# Altium PCB BB Power Supply.PcbDoc
Units mil, origin at the board's own origin, x right, y up, seen from the top; angles counter-clockwise.
Board outline 2150 x 1400 mil, 2 copper layers (Top Layer, Bottom Layer); 20 components, 12 nets, 57 pads, 0 vias.
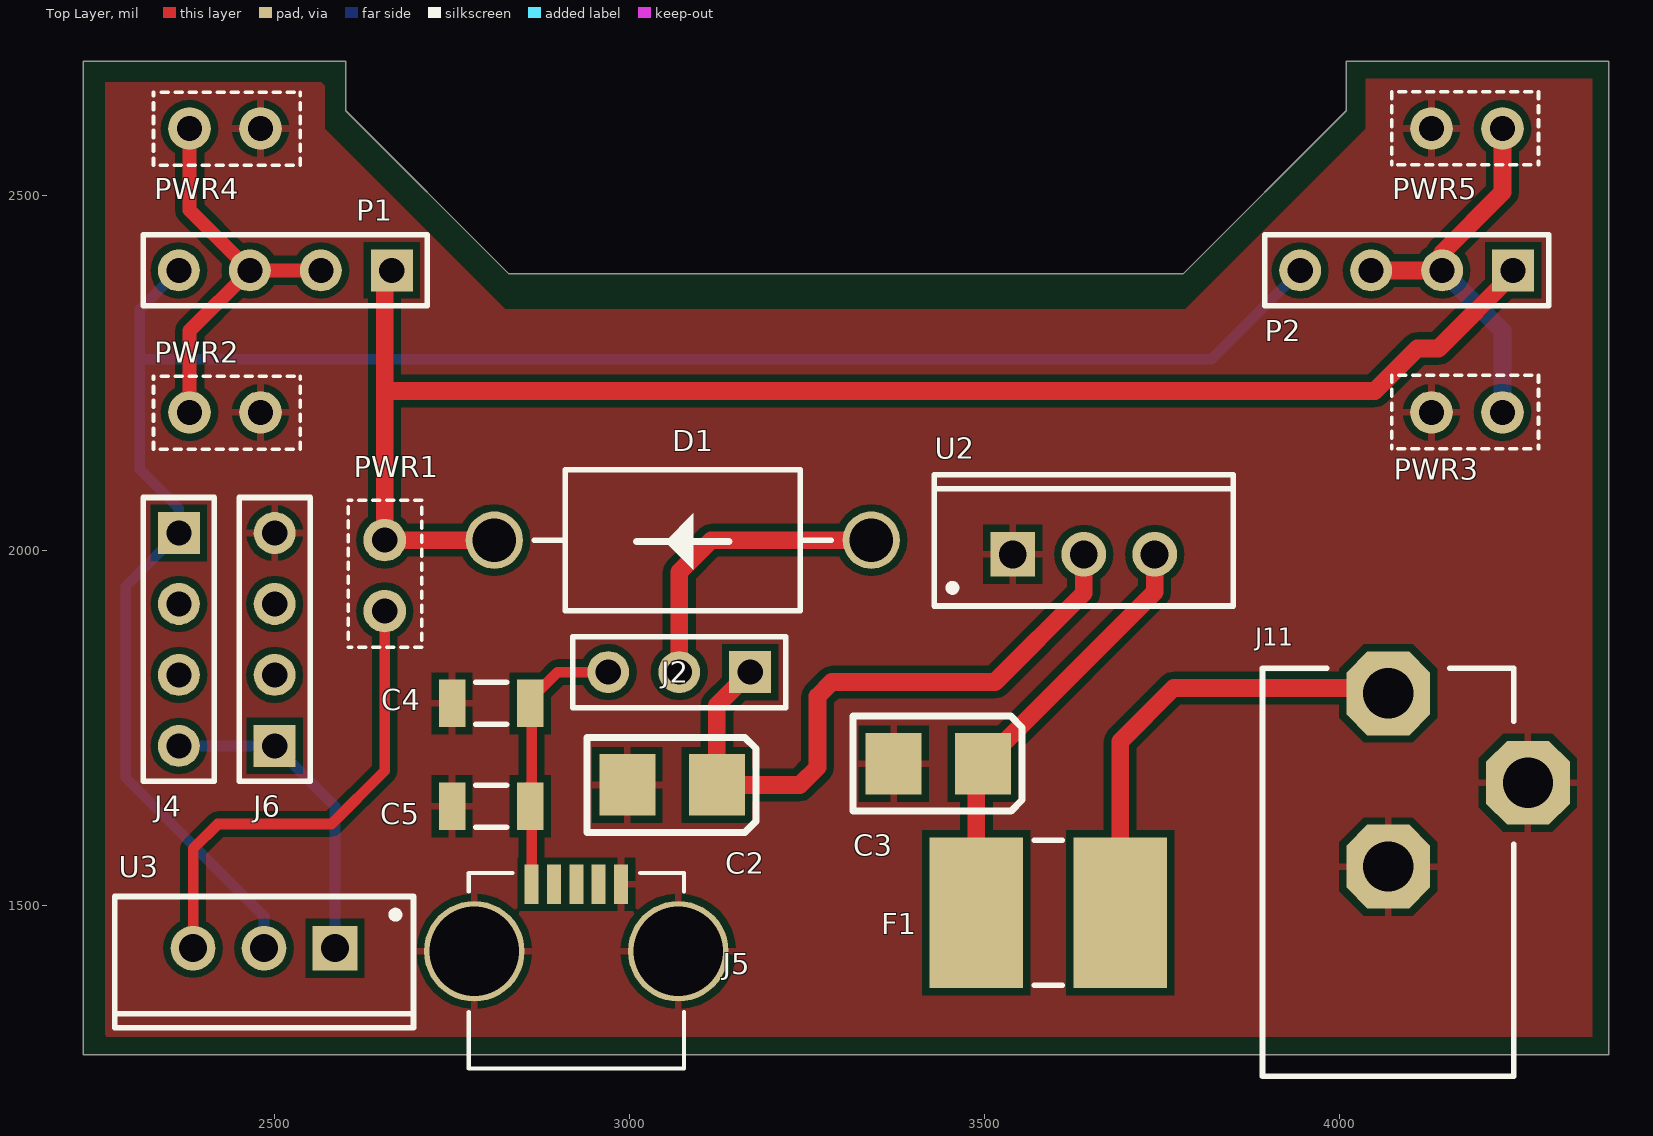
[diagram p0: Top Layer view]
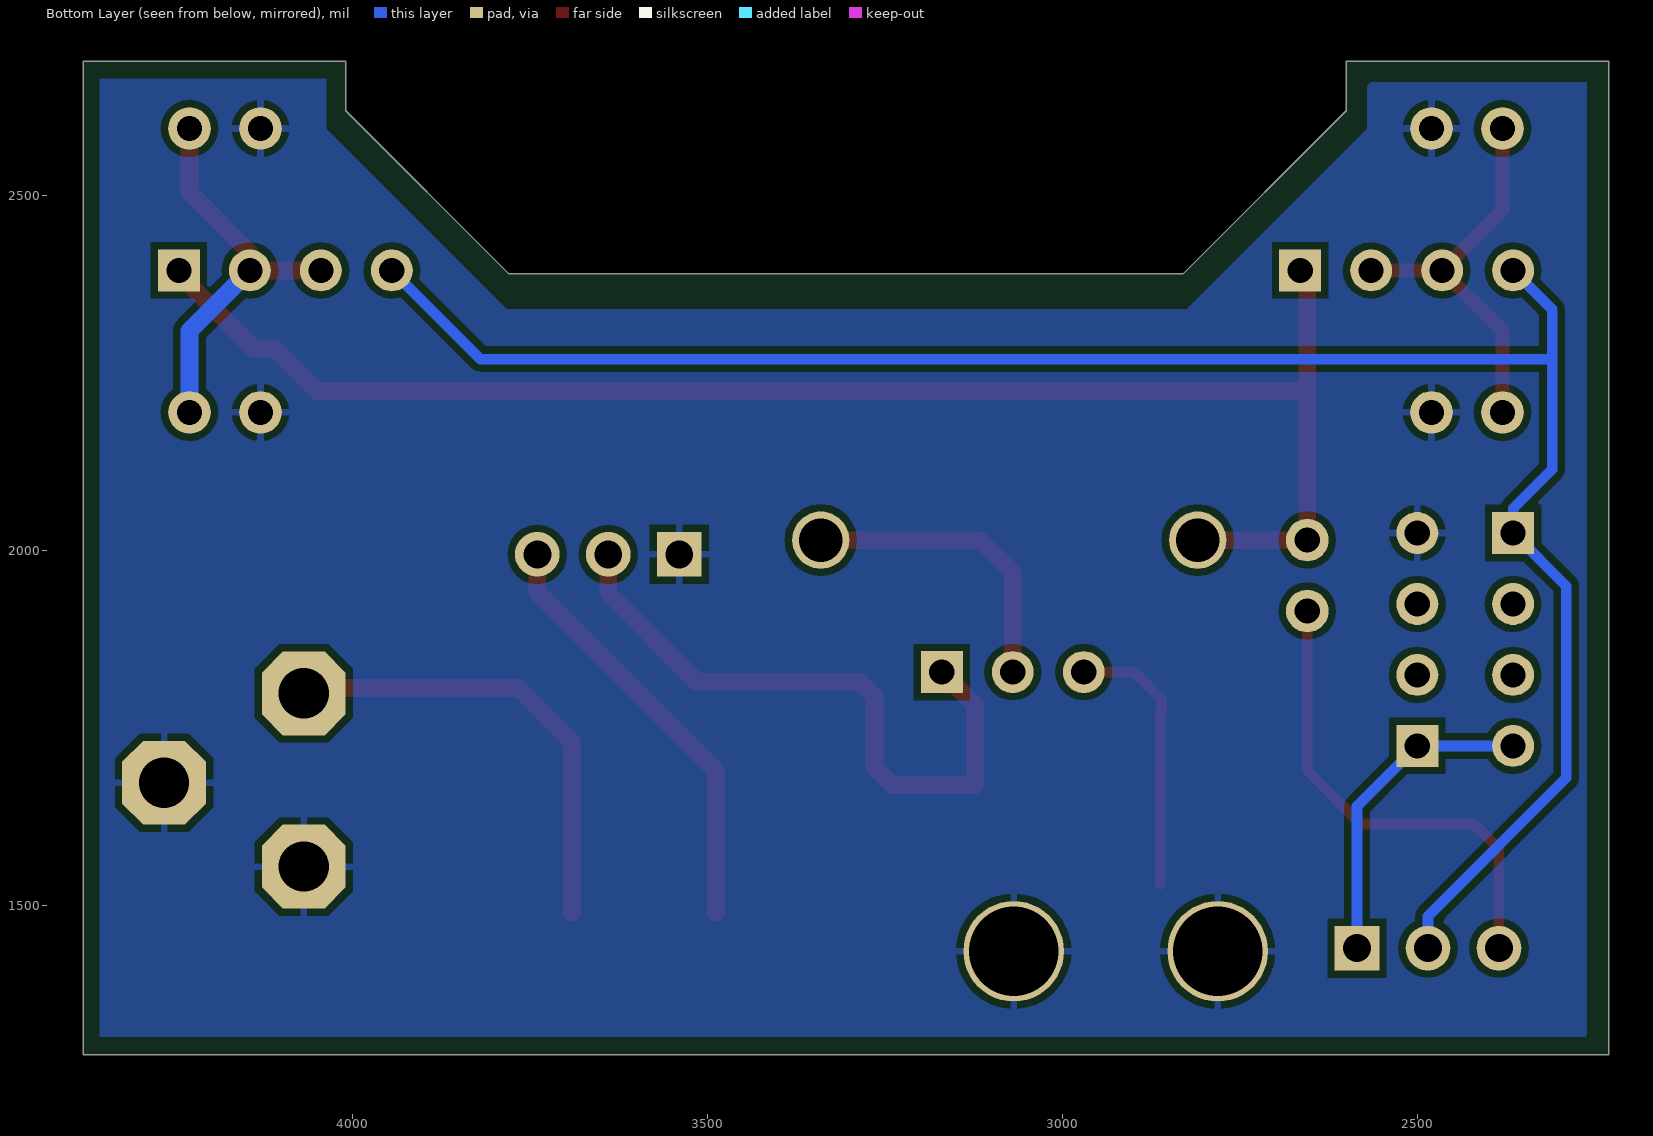
[diagram p1: Bottom Layer view, seen from below]

## Layer stack, top to bottom
Top Layer: signal copper 1.4
Dielectric: dielectric 12.6, FR-4, Dk 4.8
Bottom Layer: signal copper 1.4

## Board outline
2230,1290 2230,2690 2600,2690 2600,2620 2830,2390 3780,2390 4010,2620 4010,2690 4380,2690 4380,1290

## Design rules (kind name [scope] priority, off if disabled: settings)
Clearance [All] p1: gap=10
PolygonConnect [All] p1: connectstyle=Relief reliefconductorwidth=10 reliefentries=4 polygonreliefangle="90 Angle" airgapwidth=10
RoutingVias [All] p1: holewidth=28 width=50 viastyle="Through Hole" minholewidth=28 minwidth=50 maxholewidth=28 maxwidth=50
SolderMaskExpansion [All] p1: expansion=4
Width [All] p1: maxlimit=25 minlimit=7 preferedwidth=10
28 further rules are at their usual default settings.

## Components (designator, comment, footprint, x,y, rotation, side; value= is the part's Value field where it differs from the comment)
C2 "TAJB106K020R" AVX-CAPC3528_V 3060,1670 r180 top
C3 "TAJB106K020R" AVX-CAPC3528_V 3435,1700 r180 top
C4 "AP 4.7uF 6.3V 1206(3216)" CAPC1206(3216)190_L 2805,1785 r180 top
C5 "AP 100uF 6.3V 1206(3216)" CAPC1206(3216)190_L 2805,1640 r180 top
D1 "1N5820RLG" ONSC-AXIAL_LEAD-2-267-05_V 3075,2015 r0 top
F1 "SMD2920P300TF" FUSE2920 3590,1490 r0 top
J2 "3-WAY JUMPER" HDR1X3 3150,1725 r180 top
J4 "801-87-004-10-001101" HDR1X4 2365,2025 r270 top
J5 "UX60SC-MB-5S8" UX60SC-MB-5S8 2925,1290 r0 top
J6 "801-87-004-10-001101" HDR1X4 2500,1725 r90 top
J11 "PWR CONNECTOR" PJ-102AH 4069,1799.09 r270 top
P1 "Header 4" HDR1X4 2665,2395 r180 top
P2 "Header 4" HDR1X4 4245,2395 r180 top
PWR1 "Jumper" JMP1X2 2655,2015 r0 top
PWR2 "Jumper" JMP1X2 2480,2195 r270 top
PWR3 "Jumper" JMP1X2 4130,2195 r90 top
PWR4 "Jumper" JMP1X2 2480,2595 r270 top
PWR5 "Jumper" JMP1X2 4130,2595 r90 top
U2 "LM1117T-5.0" T03B 3640,1995 r0 top
U3 "LM1117T-ADJ" T03B 2485,1440 r180 top

## Footprints (in the part's own frame and the unit in brackets; to place one, negate y for a bottom-side part, rotate by r counter-clockwise, add the part's x,y. Pads: shape width x height; smd on the part's side, far side on the other; paste and mask are expansions set on the pad)
AVX-CAPC3528_V [mm] "SMT Capacitor, 2 Leads, Body 3.5x2.8mm"
  rect 2x2.2 smd: 1(-1.6,0) 2(1.6,0)
  silkscreen extent -3,-1.7 3.05,1.7, body extent -1.79,-1.54 1.8,1.54, height 1.9
CAPC1206(3216)190_L [mm] "Chip Capacitor, Body 3.2x1.6mm, Height 1.9mm, IPC High Density"
  rect 0.95x1.7 smd: 1(-1.4,0) 2(1.4,0)
  silkscreen extent -0.55,-0.75 0.55,0.75, body extent -1.7,-0.9 1.7,0.9, height 1.9
FUSE2920 [mm]
  rect 3.35x5.4 smd: 1(-2.575,0) 2(2.575,0)
  silkscreen extent -0.5,-2.6 0.5,2.6, body extent -3.85,-2.65 3.85,2.65, height 1
HDR1X3 [mm] "Connector; Header; 3 Position"
  rect 1.5x1.5 hole 0.9: 1(-0.508,-2.643)
  round 1.5 hole 0.9: 2(2.032,-2.643) 3(4.572,-2.643)
  silkscreen extent -1.78,-3.91 5.84,-1.37, body extent -1.78,-3.91 5.84,-1.37, height 2.67
HDR1X4 [mm] "Connector; Header; 4 Position"
  rect 1.5x1.5 hole 0.9: 1(0,0)
  round 1.5 hole 0.9: 2(2.54,0) 3(5.08,0) 4(7.62,0)
  silkscreen extent -1.27,-1.27 8.89,1.27
JMP1X2 [mil]
  round 60 hole 35.5: 1(0,0) 2(0,-100)
  silkscreen extent -51,-151 52,56, body extent -49,-154 49,46, height 323
ONSC-AXIAL_LEAD-2-267-05_V [mm] "AXIAL, 2-Leads, Diameter 5.05mm"
  round 2.05 hole 1.55: 1(-6.745,0) 2(6.745,0)
  silkscreen extent -5.32,-2.53 5.32,2.53
PJ-102AH [mm]
  oct 3x3 hole 1.8: 1(0,0) 2(6.2,0) 3(3.2,5)
  silkscreen extent -0.9,-4.5 13.7,4.5, body extent -0.61,-4.49 13.79,4.91, height 11.02
T03B [mm] "TO, Thru-Hole, Vertical, Heatsink Mounted; 3 In-Line Leads; Pitch 2.54 mm"
  rect 1.6x1.6 hole 1: 1(-2.54,0)
  round 1.6 hole 1: 2(0,0) 3(2.54,0)
  silkscreen extent -5.35,-1.85 5.35,2.85, body extent -5.4,-1.9 5.4,2.9, height 19.8
UX60SC-MB-5S8 [mm]
  rect 0.5x1.4 smd: 1(-1.6,6.1) 2(-0.8,6.1) 3(0,6.1) 4(0.8,6.1) 5(1.6,6.1)
  round 3.6 hole 3.2: MH1(3.65,3.7) MH2(-3.65,3.7)
  silkscreen extent -3.85,-0.5 3.85,6.5, body extent -3.85,-0.5 3.85,6.5, height 3.92

## Part data
C2 C3: library part CMP-0279-00001-1, "Capacitor, Tantalum, 10uF 10% 20V MCCT-B (3528)"
C4 C5: library part CMP-0402-0000, "CAP 100uF 6.3V ?0% 1206 (3216 Metric) Thickness 1.9mm SMD"
D1: library part CMP-1055-00027-1, "Rectifier, 2-Pin Axial_Lead, Pb-Free, Tape and Reel"
F1: library part CMP-0204-0023, "PTC RESETTABLE 16V 3A SMD 2920"
J2: "3-Way Jumper - Center Output"
J4 J6: "IC REG LDO 3V3 .3A SOT25"
J5: library part CMP-0300-0119, "CONN RCPT MINI USB2.0 5POS SLD"
J11: library part POWER-CONNECTOR-3, "Connector, 3 Conductor Power Jack"
P1 P2: "Header, 4-Pin"
PWR1: library part JMP1X2_SERIES, "Standard 2 Pin Jumper, 100mil spacing"
PWR2 PWR3 PWR4 PWR5: library part JMP1X2, "Standard 2 Pin Jumper, 100mil spacing"
U2: library part CMP-0062-02495-2, "800mA Low-Dropout Linear Regulator, 3-pin TO-220"
U3: library part CMP-0062-02492-2, "800mA Low-Dropout Linear Regulator, 3-pin TO-220, Pb-Free"

## Nets (pads, with @x,y where several pads share a name; then routed paths per layer and width w, separated by ;. In a path a pad name is that pad's centre, name@x,y a point inside that pad or via, vN(x,y) a via of type N, cw(c..) or ccw(c..) an arc to the next point about the centre after c; other vN are vias at no path point)
5V0_REG: C2.1 J2.1 U2.2 | length 921
  Top Layer w25: J2.1 3122.99,1782.04 C2.1 3240,1670 3265,1695 3265,1795 3285,1815 3515,1815 3640,1940 U2.2
5V0_USB: C4.1 C5.1 J2.3 J5.1 | length 386.9
  Top Layer w15: J5.1 2862.01,1773.11 2860.12,1775 2859.99,1775.13 2859.99,1789.99 2899.06,1829.06 J2.3
5VOUT: D1.1 P1.1 P2.1 PWR1.1 | length 2200.5
  Top Layer w25: P1.1 2655,2385 2655,2225 ; D1.1 PWR1.1 2655,2225 ; P2.1@4247.5,2392.5 4140,2285 4110,2285 4050,2225 2655,2225
ADJOUT: J4.1 P1.4 P2.4 U3.2 | length 2799.2
  Bottom Layer w15: P1.4 2310,2340 2310,2270 ; U3.2 2485,1485 2290,1680 2290,1950 J4.1 2365,2060 2310,2115 2310,2270 ; P2.4 3820,2270 2310,2270
DC_PWR: C3.1 F1.1 U2.3 | length 609.1
  Top Layer w25: F1.1 3488.62,1690.63 C3.1 3740,1942.01 U2.3
GND: C2.2 C3.2 C4.2 C5.2 J5.5 J5.MH1 J5.MH2 J6.4 J11.2 J11.3 PWR2.1 PWR3.1 PWR4.1 PWR5.1 U2.1 | length 54
  Top Layer w25: J11.3@4266.85,1626.85 J11.3@4266.85,1680.81
NetD1_2: D1.2 J2.2 | length 430.1
  Top Layer w25: J2.2 3070.01,1970.01 3115,2015 D1.2
NetF1_2: F1.2 J11.1 | length 651.2
  Top Layer w25: F1.2 3691.38,1731.38 3766.79,1806.79 J11.1@4070,1806.79
NetJ4_4: J4.4 J6.1 U3.1 | length 455.2
  Bottom Layer w15: J4.4 J6.1 2585,1640 U3.1
NetPWR1_2: PWR1.2 U3.3 | length 680.6
  Top Layer w15: U3.3 2385,1580 2420,1615 2580,1615 2655,1690 PWR1.2
PWR-L: P1.2 P1.3 PWR2.2 PWR4.2 | length 570.4
  Top Layer w20: PWR2.2 2380,2310 P1.3 ; PWR4.2 2380,2480 P1.3 ; P1.2 P1.3
PWR-R: P2.2 P2.3 PWR3.2 PWR5.2 | length 570.4
  Top Layer w25: P2.3 P2.2 4145,2420 4230,2505 PWR5.2
  Bottom Layer w25: P2.2 4230,2310 PWR3.2
pads on no net: J4.2 J4.3 J5.2 J5.3 J5.4 J6.2 J6.3

## Polygon pours and split planes (outlines as drawn)
GND on Bottom Layer "Top Layer-GND" (solid, pour order 6): 2256.35,1315 2261.34,1320 2261.34,2660 2565.62,2660 2570.61,2655 2570.61,2600 2570.61,2595 2825,2340 3782.72,2340 4037.11,2595 4037.11,2665 4356.35,2665 4356.35,1315 2256.35,1315
GND on Top Layer "Top Layer-GND" (solid, pour order 7): 2256.35,1315 2261.34,1320 2261.34,2660 2565.62,2660 2570.61,2655 2570.61,2600 2570.61,2595 2825,2340 3782.72,2340 4037.11,2595 4037.11,2665 4356.35,2665 4356.35,1315 2256.35,1315

## Silkscreen, mask and mechanical layers (free items; w line width, h text height)
Top Overlay:
  region: 3090,1973 3050,2013 3090,2053
  lines w10: 3010,2013 3140,2013
Mechanical 2:
  lines w10: 2230,1290 2230,2690 2530,2690 2600,2690 2600,2620 2830,2390 3780,2390 4010,2620 4010,2690 4380,2690 4380,1290 2230,1290